# EAGLE board Possible Board Schematic #1 v2 (EAGLE 9.7.0)
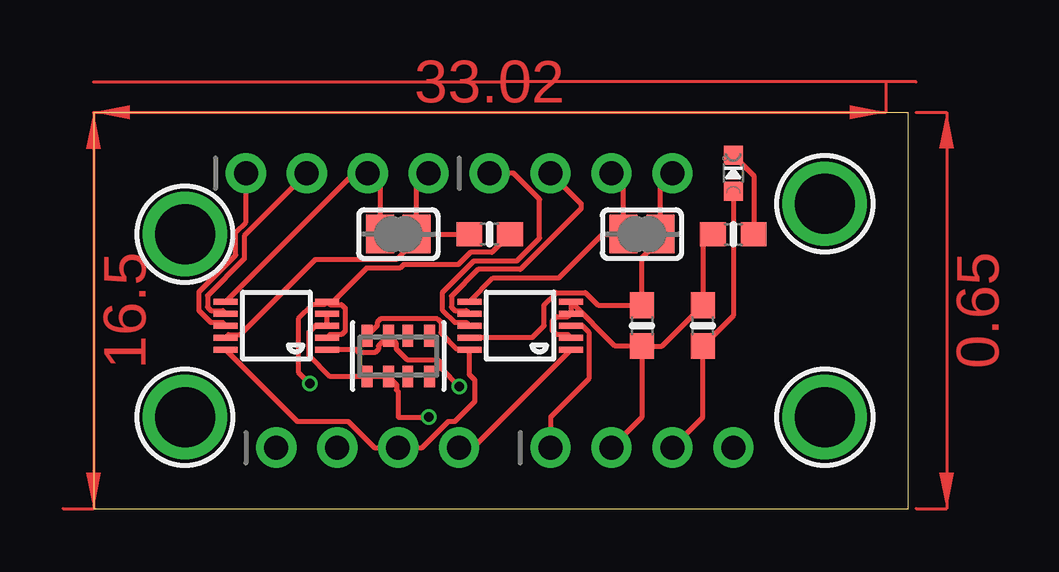
[diagram p0: board, top side]
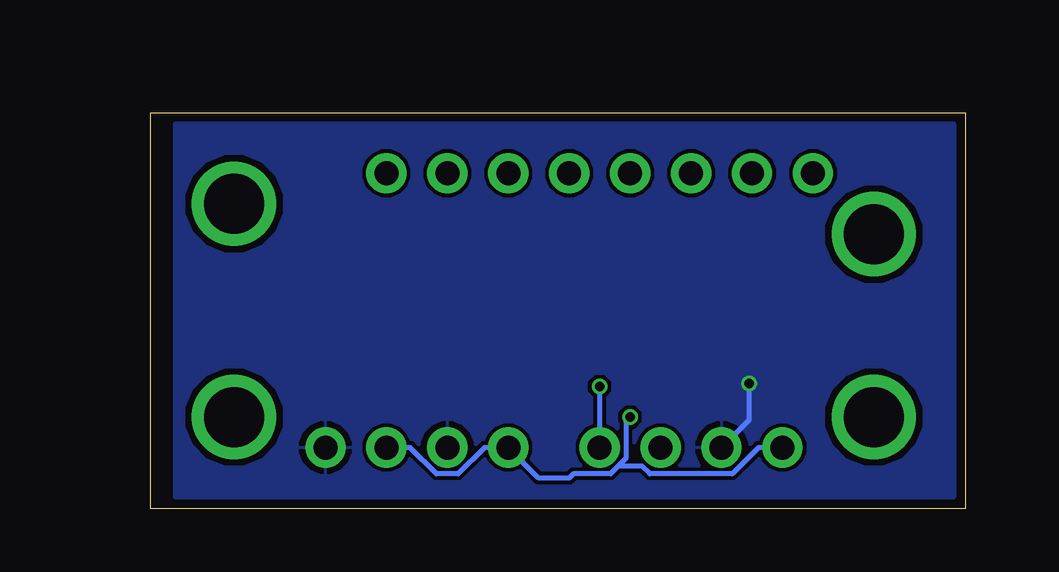
[diagram p1: board, bottom side, seen from below]

Size 33.96 x 16.5 mm. Coordinates in mm from the lower left corner, seen from the top.
Outline: 0,0 33.96,0 33.96,16.5 0,16.5 0,0
Copper layers (1*16): Top / Bottom
Stack-up Default Layer Stack: Top User Defined 0.035559375mm / Dielectric-1 User Defined 1.6mm / Bottom User Defined 0.035559375mm
Design rules: minimum drill size 10mil, minimum copper width 6mil, keepout clearance 0mil, drill distance 6mil, dimension clearance 15mil, restrict clearance 0mil, copper clearance wire_polygon to wire_polygon 6mil, copper clearance wire_polygon to pad_smd 6mil, copper clearance wire_polygon to via 6mil, copper clearance pad_smd to pad_smd 6mil, copper clearance pad_smd to via 6mil, copper clearance via to via 6mil, copper clearance smd to pad (same net) 6mil, copper clearance smd to via (same net) 6mil, copper clearance smd to smd (same net) 6mil

## Footprints (pad centres in the part's own frame; a part is rotated, then mirrored left to right if it is on the bottom)
0603-NO = smd 1.075 x 1: 1 -0.85,0; 2 0.85,0
CHIPLED_0603_NOOUTLINE = smd 0.8 x 0.8: A 0,-0.75; C 0,0.75
1X04_ROUND = drill 1 pad 1.676: 1 -3.81,0; 2 -1.27,0; 3 1.27,0; 4 3.81,0
RESPACK_4X0603 = smd 0.45 x 0.9: 1 -1.3,-0.85; 2 -0.4,-0.85; 3 0.4,-0.85; 4 1.3,-0.85; 5 1.3,0.85; 6 0.4,0.85; 7 -0.4,0.85; 8 -1.3,0.85
SOLDERJUMPER_CLOSEDWIRE = smd 1.168 x 1.6: 1 -0.762,0; 2 0.762,0 | smd 0.635 x 0.203: WIRE 0,0
MSOP10 = smd 0.25 x 1: 1 -1,-2.113; 2 -0.5,-2.113; 3 0,-2.113; 4 0.5,-2.113; 5 1,-2.113; 6 1,2.113; 7 0.5,2.113; 8 0,2.113; 9 -0.5,2.113; 10 -1,2.113
MOUNTINGHOLE_2.5_PLATED = drill 2.5 pad 3.2: P$1 0,0

## Placement (x,y rotation side)
C2  0.1uF  [0603-NO]  22.86,7.62 270 top
C3  0.1uF  [0603-NO]  25.4,7.62 90 top
C4  0.1uF  [0603-NO]  16.51,11.43 0 top
D1  GREEN  [CHIPLED_0603_NOOUTLINE]  26.67,13.97 0 top
JP1  [1X04_ROUND]  10.16,13.97 0 top
JP2  [1X04_ROUND]  11.43,2.54 0 top
JP3  [1X04_ROUND]  20.32,13.97 0 top
JP4  [1X04_ROUND]  22.86,2.54 0 top
R1  10K  [0603-NO]  26.67,11.43 180 top
R5  10K  [RESPACK_4X0603]  12.7,6.35 180 top
SJ3  [SOLDERJUMPER_CLOSEDWIRE]  22.86,11.43 180 top
SJ4  [SOLDERJUMPER_CLOSEDWIRE]  12.7,11.43 180 top
U$1  DS3502  [MSOP10]  17.78,7.62 90 top
U$2  MOUNTINGHOLE2.5  [MOUNTINGHOLE_2.5_PLATED]  3.81,3.81 0 top
U$3  MOUNTINGHOLE2.5  [MOUNTINGHOLE_2.5_PLATED]  30.48,12.7 0 top
U$5  DS3502  [MSOP10]  7.62,7.62 90 top
U$6  MOUNTINGHOLE2.5  [MOUNTINGHOLE_2.5_PLATED]  30.48,3.81 0 top
U$7  MOUNTINGHOLE2.5  [MOUNTINGHOLE_2.5_PLATED]  3.81,11.43 0 top

## Library data of the parts
C2-C4 D1 JP1-JP4 R1 R5 SJ3 SJ4 U$1 U$5 = microbuilder
U$2 U$3 U$6 U$7 = microbuilder; BOM: EXCLUDE

## Nets
GND: C2.2 C3.2 C4.2 JP2.2 JP4.2 JP4.4 R1.2 U$1.2 U$1.4 U$1.5 U$5.2 U$5.5
N$2: D1.C R1.1
RH1: JP3.3 SJ3.2 U$1.6
RH2: JP1.3 SJ4.2 U$5.6
RL1: JP3.1 U$1.8
RL2: JP1.1 U$5.8
RW1: JP3.2 U$1.7
RW2: JP1.2 U$5.7
SCL: JP2.3 R5.4 U$1.10 U$5.10
SDA: JP2.4 R5.3 U$1.1 U$5.1
V+1: C2.1 JP3.4 SJ3.1 U$1.9
V+2: C4.1 JP1.4 SJ4.1 U$5.9
VCC: C3.1 D1.A JP2.1 JP4.1 JP4.3 R5.5 R5.6 U$1.3 U$5.3 U$5.4

## Tracks (layer width: path | path; a pad name or v marks a point on that pad's centre or on a via)
GND  (via drill 0.4 pad 0.6)
  Top 0.203: R1.2 25.4,11.01 C3.2 23.7,6.77 C2.2 | C2.2 22.86,3.81 JP4.2 | U$1.2 19.77,7.24 19.29,7.24 19.14,7.39 19.14,7.85 19.29,8 19.77,8 U$1.4 U$1.5 21.74,6.77 C2.2 | 9.85,8.5 U$5.5 9.61,8.5 9.13,8.5 8.53,7.91 8.53,5.68 v9.01,5.2 | 9.85,8.5 10.34,8.5 10.49,8.35 10.49,7.39 10.34,7.24 9.85,7.24 U$5.2 | 9.85,8.5 11.38,10.02 12.78,10.02 12.91,10.16 15.2,10.16 15.71,10.68 16.61,10.68 C4.2
  Bottom 0.203: v9.01,5.2 9.01,3.69 JP2.2
  pour Bottom: 33.02,16.51 0,16.51 0,0 33.02,0
N$2
  Top 0.203: D1.C 27.52,13.87 R1.1
RH1
  Top 0.203: JP3.3 22.1,13.46 SJ3.2 21.22,11.43 19.39,9.61 16.66,9.61 U$1.6
RH2
  Top 0.203: SJ4.2 11.94,13.46 JP1.3 10.86,13.97 U$5.6
RL1
  Top 0.203: JP3.1 17.5,13.97 18.6,12.88 18.6,11.27 17.65,10.32 15.86,10.32 14.56,9.02 14.56,8.24 15.06,7.74 15.55,7.74 U$1.8
RL2
  Top 0.203: JP1.1 6.35,11.93 5.93,11.51 5.93,10.55 4.4,9.02 4.4,8.24 4.9,7.74 5.39,7.74 U$5.8
RW1
  Top 0.203: U$1.7 15.55,8.24 15.06,8.24 14.91,8.39 14.91,8.85 16.03,9.96 17.79,9.96 20.32,12.49 20.32,12.7 JP3.2
RW2
  Top 0.203: JP1.2 6.28,11.36 6.28,10.41 4.75,8.88 4.75,8.39 4.9,8.24 5.39,8.24 U$5.7
SCL
  Top 0.203: R5.4 11.82,7.62 11.82,7.75 11.97,7.9 14.33,7.9 14.48,7.75 14.48,7.32 15.18,6.62 U$1.10 15.67,5.58 15.9,5.35 15.9,4.47 15.06,3.63 14.79,3.63 13.7,2.54 JP2.3 11.71,2.54 10.61,3.63 8.49,3.63 U$5.10
SDA  (via drill 0.4 pad 0.6)
  Top 0.203: U$1.1 15.81,2.54 JP2.4 | U$5.1 10.95,6.62 11.07,6.5 11.73,6.5 11.88,6.64 11.88,6.78 R5.3 12.62,6.88 12.62,6.64 13.06,6.2 14.33,6.2 14.48,6.05 14.48,5.84 v15.24,5.08
  Bottom 0.203: v15.24,5.08 JP2.4
V+1
  Top 0.203: JP3.4 23.62,13.46 SJ3.1 23.43,11.24 23.43,11.02 22.86,10.45 C2.1 21.03,8.47 20.5,9 19.29,9 18.78,8.49 18.78,7.62 18.28,7.12 U$1.9
V+2
  Top 0.203: SJ4.1 13.46,13.46 JP1.4 | SJ4.1 C4.1 | U$5.9 5.63,7.24 6.11,7.24 9.25,10.38 12.63,10.38 13.27,11.02 13.27,11.24 SJ4.1
VCC  (via drill 0.4 pad 0.6)
  Top 0.203: D1.A 26.67,8.04 C3.1 25.4,3.81 JP4.3 | U$5.4 U$5.3 9.25,7.62 8.98,7.35 8.98,6.39 9.87,5.5 R5.5 R5.6 12.62,5.18 12.62,4.95 12.7,4.87 12.7,3.81 v13.97,3.81 | JP4.1 19.05,3.81 20.65,5.41 20.65,7.35 20.38,7.62 U$1.3
  Bottom 0.203: 14.47,1.77 14.15,2.09 14.15,3.63 v13.97,3.81 | 14.47,1.77 14.79,1.45 16.33,1.45 16.51,1.27 17.78,1.27 JP4.1 20.05,2.54 21.14,1.45 22.04,1.45 23.14,2.54 JP4.3 | JP2.1 8.62,2.54 9.71,1.45 13.15,1.45 13.47,1.77 14.47,1.77
(copper drawn outside any net)
  shapes: Top area x4

## Text on the board
silk_top: RL2 | RW2 | RH2 | V+2 | RL1 | RW1 | RH1 | V+1 | VCC | GND | SCL | SDA | VCC | GND | VCC | GND